# Altium PCB Radio_USB.pcbdoc
Units mm, origin at the board's own origin, x right, y up, seen from the top; angles counter-clockwise.
Board outline 52 x 67.1 mm, 2 copper layers (Top Layer, Bottom Layer); 75 components, 51 nets, 298 pads, 154 vias.
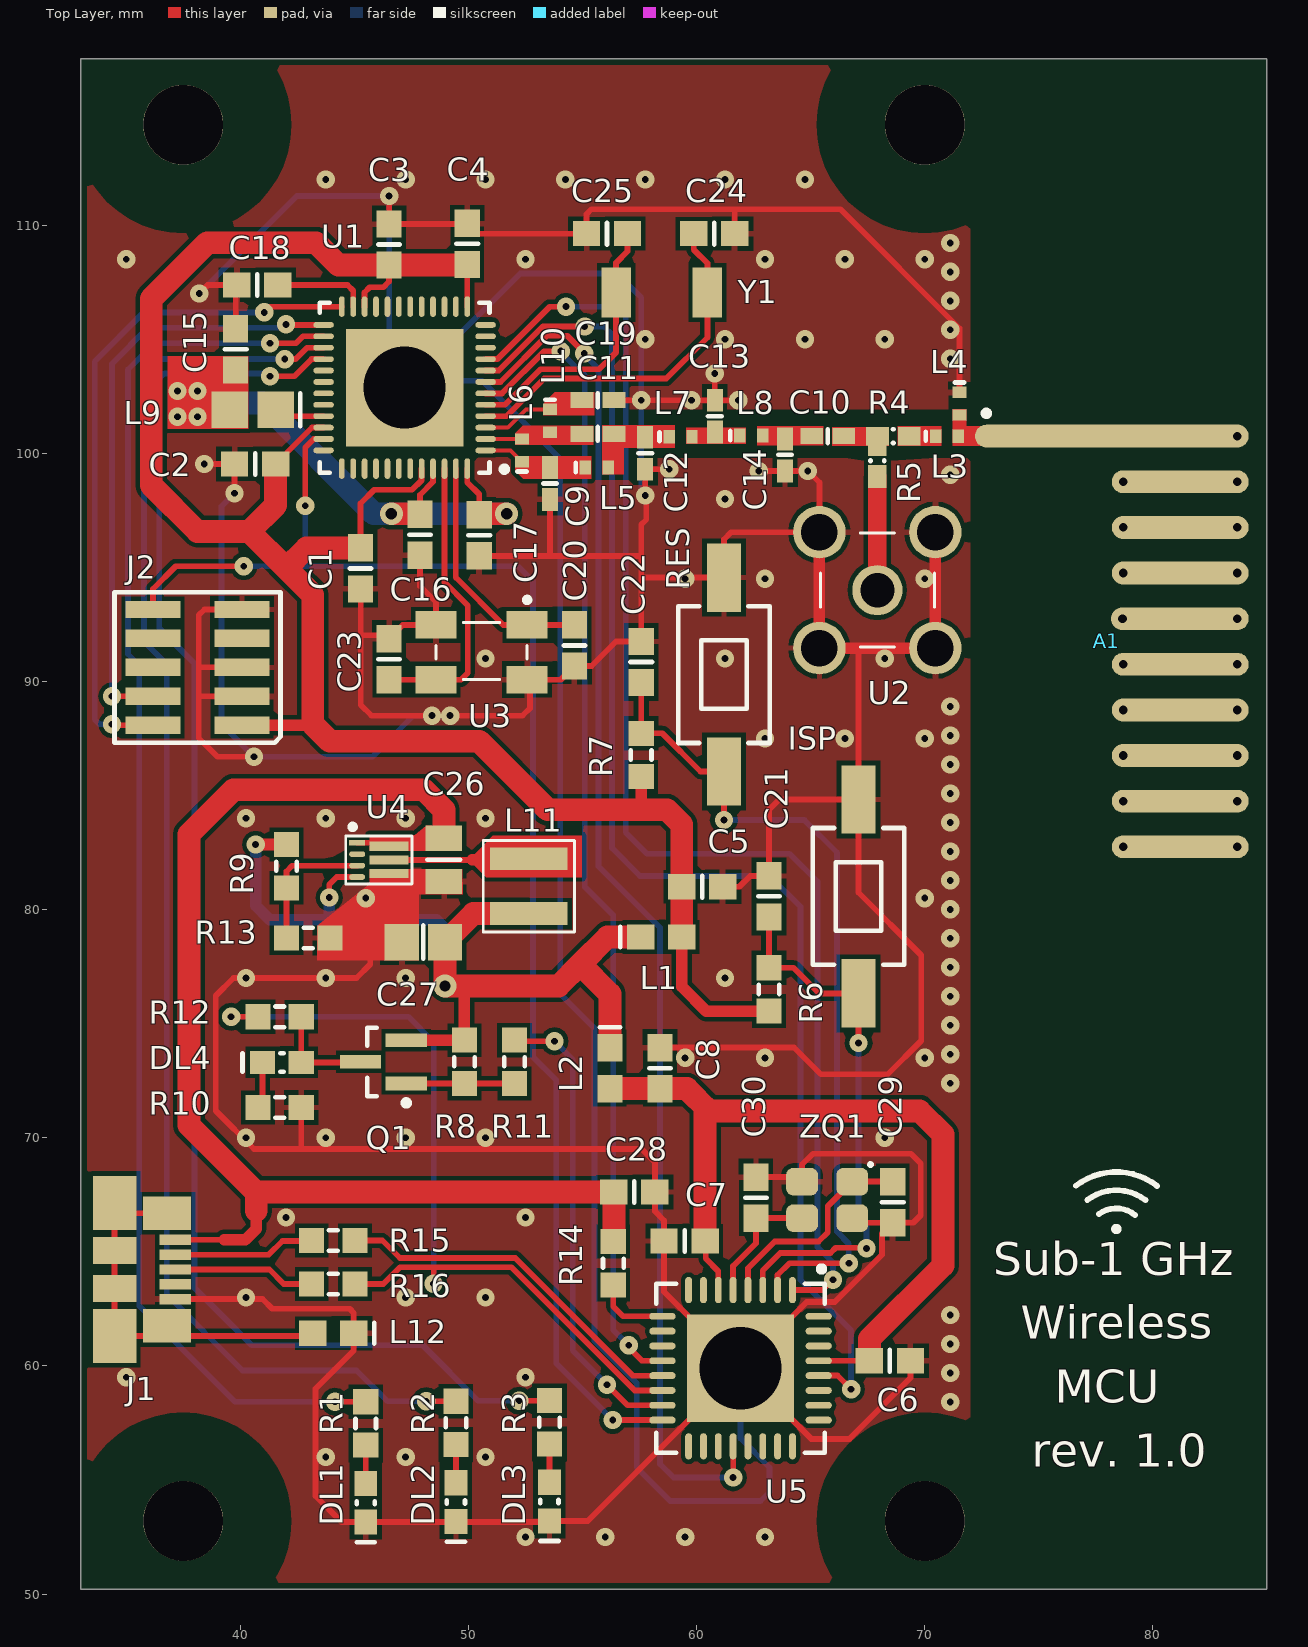
[diagram p0: Top Layer view]
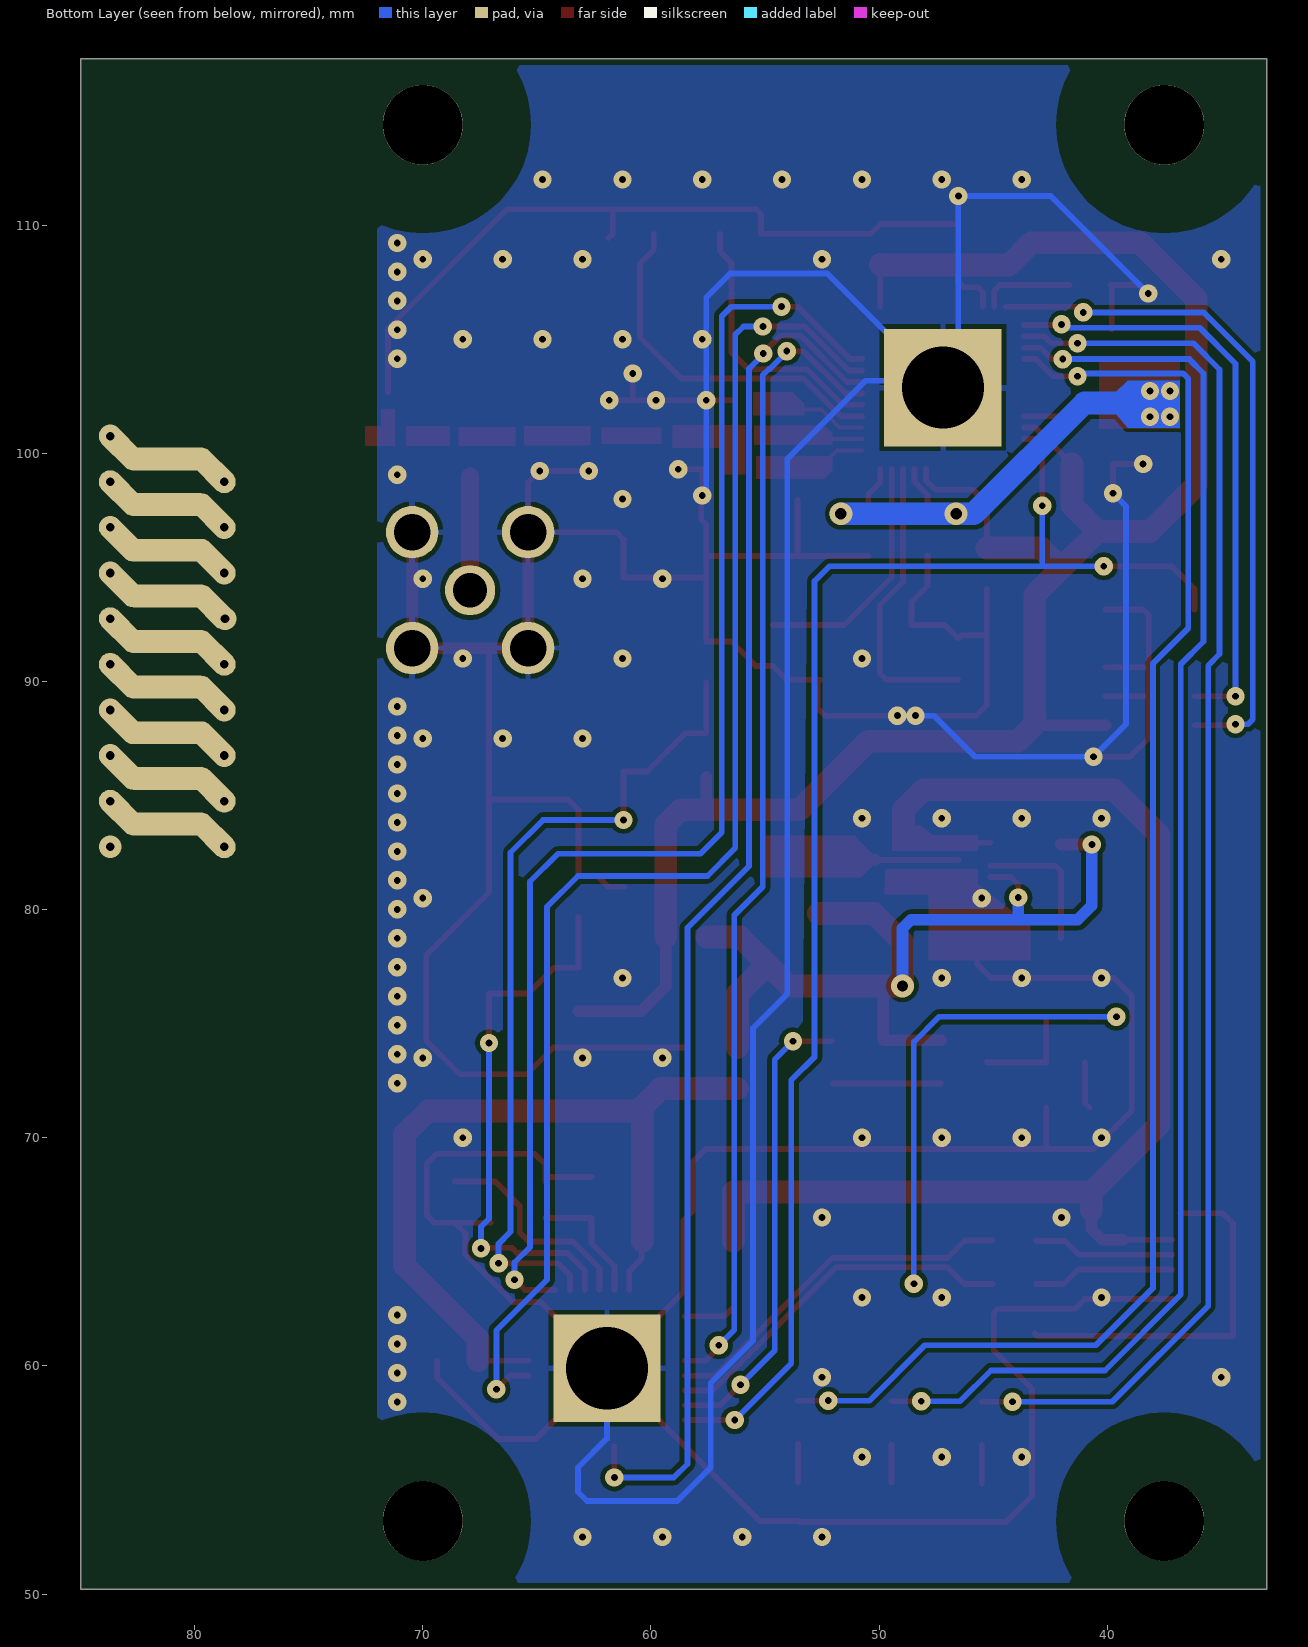
[diagram p1: Bottom Layer view, seen from below]
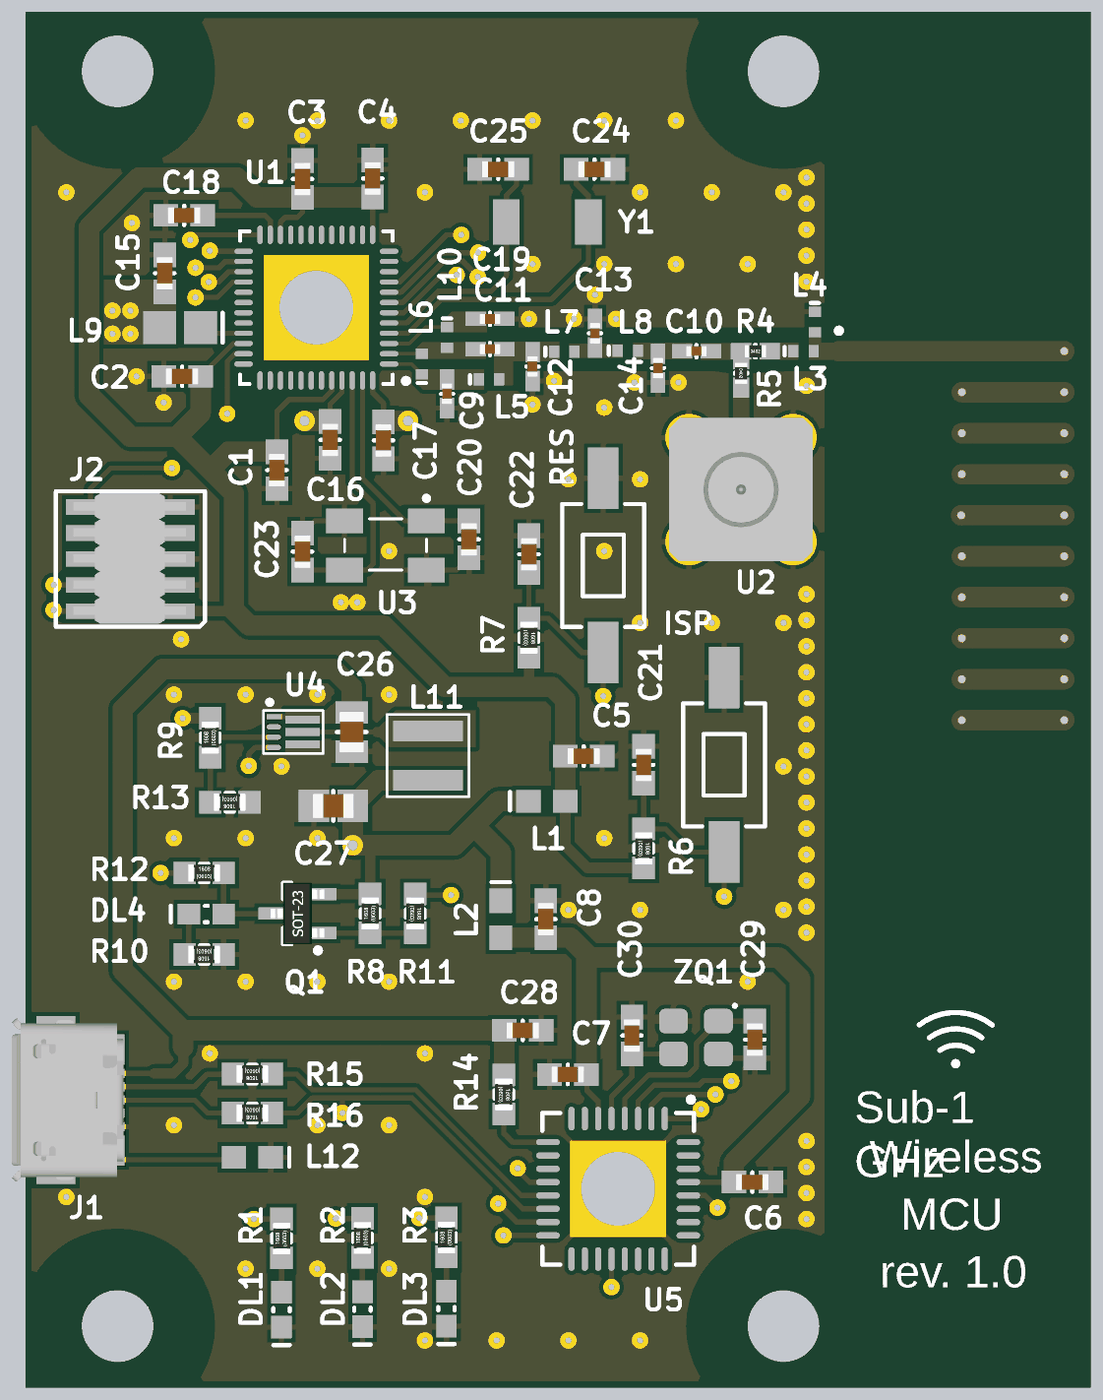
[diagram p2: 3D render of the assembled board from above, using the file's embedded part models]

## Layer stack, top to bottom
Top Solder: solder mask 0.0102, Solder Resist, Dk 3.5
Top Layer: signal copper 0.0356
Dielectric 1: dielectric 0.32, FR-4, Dk 4.8
Bottom Layer: signal copper 0.0356
Bottom Solder: solder mask 0.0102, Solder Resist, Dk 3.5

## Board outline
33,50.2 85,50.2 85,117.3 33,117.3

## Design rules (kind name [scope] priority, off if disabled: settings)
AssemblyTestPointUsage [All] p1 off:
AssemblyTestpoint [All] p1 off: testpointundercomponent=TRUE minsize=1.016 maxsize=2.54 preferedsize=1.524 minholesize=0 maxholesize=1.016 preferedholesize=0.813 testpointgrid=0.025 usegrid=TRUE gridtolerance=0 allowsidetop=TRUE allowsidebottom=TRUE
Clearance UnplatedPads_Clearance [IsPad and OnLayer('Multi-Layer') and not PadIsPlated] p1: gap=3
Clearance Poly_Clearance [InPolygon] p2: gap=0.2
Clearance Class4_ExtLayers_Clearance [All] p3: gap=0.15
Clearance Class4_IntLayers_Clearance [OnCopper and not (OnLayer('Top Layer') or OnLayer('Bottom Layer'))] p4: gap=0.15
DiffPairsRouting [All] p1: maxlimit=0.15 minlimit=0.15 mostfreqgap=0.15 toplayer_minwidth=0.25 toplayer_maxwidth=0.25 toplayer_prefwidth=0.25 bottomlayer_minwidth=0.25 bottomlayer_maxwidth=0.25 bottomlayer_prefwidth=0.25 maxuncoupledlength=10
FabricationTestPointUsage [All] p1 off: valid=0 allowmultiple=FALSE
FabricationTestpoint [All] p1 off: side=3 testpointundercomponent=TRUE minsize=1.016 maxsize=2.54 preferedsize=1.524 minholesize=0 maxholesize=1.016 preferedholesize=0.813 testpointgrid=0.025 allowsidetop=TRUE allowsidebottom=TRUE usegrid=TRUE gridtolerance=0
HoleSize HoleSize_UnplatedPads [IsPad and not PadIsPlated] p1: absolutevalues=TRUE maxlimit=999 minlimit=0.5 maxpercent=80.000 minpercent=20.000
HoleSize HoleSize_PlatedPads [IsPad and PadIsPlated] p2: absolutevalues=TRUE maxlimit=999 minlimit=0.3 maxpercent=80.000 minpercent=20.000
MinimumAnnularRing MinimumAnnularRing_Pad [IsPad and PadIsPlated] p1: minimumring=0.25
MinimumAnnularRing MinimumAnnularRing_Via [IsVia] p2: minimumring=0.15
MinimumSolderMaskSliver [All] p1: minsoldermaskwidth=0.15
NetAntennae [All] p1 off: netantennaetolerance=0
PlaneClearance [All] p1: clearance=0.3
PlaneConnect [All] p1: planeconnectstyle=Relief reliefexpansion=0.5 reliefentries=4 reliefconductorwidth=0.25 reliefairgap=0.2
PlaneConnect PlaneConnect_Via_Thermal [IsVia or InPadClass('ThermalPads')] p2: planeconnectstyle=Direct reliefexpansion=0.508 reliefentries=4 reliefconductorwidth=0.254 reliefairgap=0.254
PolygonConnect PolygonConnect_Via [IsVia] p1: connectstyle=Direct reliefconductorwidth=0.254 reliefentries=4 polygonreliefangle="90 Angle" airgapwidth=0.254
PolygonConnect [All] p2: connectstyle=Relief reliefconductorwidth=0.25 reliefentries=4 polygonreliefangle="90 Angle" airgapwidth=0.2
RoutingVias RADIO_RoutingVias [HasFootprint('ANTENNA')] p1: holewidth=0.2 width=1.2 viastyle="Through Hole" minholewidth=0 minwidth=0.5 maxholewidth=1 maxwidth=2
RoutingVias Thermal_RoutingVias [IsVia and InAnyComponent] p2: holewidth=0.2 width=0.5 viastyle="Through Hole" minholewidth=0.2 minwidth=0.5 maxholewidth=0.2 maxwidth=0.5
RoutingVias PWR_RoutingVias [InNetClass('PWR')] p3: holewidth=0.5 width=1 viastyle="Through Hole" minholewidth=0.3 minwidth=0.8 maxholewidth=0.5 maxwidth=1
RoutingVias [All] p4: holewidth=0.3 width=0.8 viastyle="Through Hole" minholewidth=0.3 minwidth=0.8 maxholewidth=0.3 maxwidth=0.8
ShortCircuit ShortCircuit_RADIO [HasFootprint('ANTENNA')] p1: allowed=TRUE
ShortCircuit [All] p2: allowed=FALSE
SilkToBoardRegionClearance [All] p1 off:
SilkToSilkClearance [All] p1: silktosilkclearance=0.15
SilkToSolderMaskClearance [IsPad vs IsText] p1: minsilkscreentomaskgap=0.05 clearancetoexposedcopper=TRUE
SolderMaskExpansion SolderMaskExpansion_Vias [IsVia] p1: expansion=-10
SolderMaskExpansion SolderMaskExpansion_Pads [IsPad] p2: expansion=0.05
Width PWR_Width [InNetClass('PWR')] p1: maxlimit=10 minlimit=0.25 preferedwidth=0.508
Width Class4_Width_ExtLayers [OnTopLayer or onBottomlayer] p2: maxlimit=10 minlimit=0.15 preferedwidth=0.15
Width Class4_Width_IntLayers [OnCopper and not (OnTopLayer or onBottomLayer)] p3: maxlimit=10 minlimit=0.15 preferedwidth=0.15
15 further rules are at their usual default settings.

## Classes and differential pairs
net class PWR: 3V3 NetL11_1 VBUS VDDR
differential pair USB: +USB_P -USB_N

## Components (designator, comment, footprint, x,y, rotation, side; value= is the part's Value field where it differs from the comment)
A1 "ANTENNA_HELICAL" ANTENNA 72.7,100.75 r0 top
C1 "CAPC_0603" CAPC1608-0603M 45.275,94.95 r90 top
C2 "CAPC_0603" CAPC1608-0603M 40.65,99.525 r0 top
C3 "CAPC_0603" CAPC1608-0603M 46.525,109.15 r270 top
C4 "CAPC_0603" CAPC1608-0603M 49.95,109.175 r270 top
C5 "CAPC_0603" CAPC1608-0603M 60.25,81 r180 top
C6 "CAPC_0603" CAPC1608-0603M 68.475,60.225 r180 top
C7 "CAPC_0603" CAPC1608-0603M 59.475,65.475 r0 top
C8 "CAPC_0603" CAPC1608-0603M 58.4,73.05 r270 top
C9 "CAPC_0402" CAPC1005-0402M 53.575,98.675 r270 top
C10 "CAPC_0402" CAPC1005-0402M 65.75,100.75 r0 top
C11 "CAPC_0402" CAPC1005-0402M 55.675,100.85 r0 top
C12 "CAPC_0402" CAPC1005-0402M 57.75,100 r90 top
C13 "CAPC_0402" CAPC1005-0402M 60.8,101.625 r270 top
C14 "CAPC_0402" CAPC1005-0402M 63.875,99.925 r90 top
C15 "CAPC_0603" CAPC1608-0603M 39.8,104.55 r270 top
C16 "CAPC_0603" CAPC1608-0603M 47.875,96.425 r90 top
C17 "CAPC_0603" CAPC1608-0603M 50.475,96.4 r90 top
C18 "CAPC_0603" CAPC1608-0603M 40.75,107.375 r0 top
C19 "CAPC_0402" CAPC1005-0402M 55.675,102.325 r180 top
C20 "CAPC_0603" CAPC1608-0603M 54.65,91.575 r90 top
C21 "CAPC_0603" CAPC1608-0603M 63.175,80.575 r270 top
C22 "CAPC_0603" CAPC1608-0603M 57.575,90.85 r270 top
C23 "CAPC_0603" CAPC1608-0603M 46.525,90.975 r270 top
C24 "CAPC_0603" CAPC1608-0603M 60.775,109.625 r180 top
C25 "CAPC_0603" CAPC1608-0603M 56.075,109.625 r0 top
C26 "CAPC_0805" CAPC2012-0805M#1 48.925,82.175 r90 top
C27 "CAPC_0805" CAPC2012-0805M#2 48.025,78.575 r0 top
C28 "CAPC_0603" CAPC1608-0603M 57.275,67.625 r180 top
C29 "CAPC_0603" CAPC1608-0603M 68.6,67.175 r90 top
C30 "CAPC_0603" CAPC1608-0603M 62.6,67.375 r270 top
DL1 "LED_0603" DIODEC1608-0603 45.5,54 r270 top
DL2 "LED_0603" DIODEC1608-0603 49.45,54.025 r270 top
DL3 "LED_0603" DIODEC1608-0603 53.55,54.05 r270 top
DL4 "LED_0603" DIODEC1608-0603 41.825,73.3 r180 top
ISP "SMD_SW" SMD_SW_1 67.1,80.575 r270 top (schematic designator S1)
J1 "USB-Micro-47346" USB_micro_B 37.152,64.225 r0 top
J2 "PLD-10-1.27-SMT" PLD-10-1.27-SMT 40.075,88.075 r180 top
L1 "INDC-0603" INDC1608M 58.45,78.8 r0 top
L2 "INDC-0603" INDC1608M 56.2,73.05 r270 top
L3 "INDC-0402" INDC1005-0402-RF2.4GHz 70.975,100.75 r0 top
L4 "INDC-0402" INDC1005-0402-RF2.4GHz 71.525,102.175 r270 top
L5 "INDC-0402" INDC1005-0402-RF2.4GHz 55.625,99.375 r0 top
L6 "INDC-0402" INDC1005-0402-RF2.4GHz 52.35,100.125 r90 top
L7 "INDC-0402" INDC1005-0402-RF2.4GHz 59.3,100.725 r0 top
L8 "INDC-0402" INDC1005-0402-RF2.4GHz 62.4,100.775 r0 top
L9 "INDC-0805" INDC2012M 40.55,101.9 r180 top
L10 "INDC-0402" INDC1005-0402-RF2.4GHz 53.575,101.425 r270 top
L11 "XFL4015" XFL4015 52.65,82.225 r270 top
L12 "INDC-0603" INDC1608M 44.078,61.431 r180 top
Q1 "BC857" SOT23-3M 46.275,73.325 r180 top
R1 "RESC_0603" RESC1608-0603M 45.5,57.475 r90 top
R2 "RESC_0603" RESC1608-0603M 49.45,57.5 r90 top
R3 "RESC_0603" RESC1608-0603M 53.55,57.525 r90 top
R4 "RESC_0402" RESC1005-0402M 68.625,100.75 r0 top
R5 "RESC_0402" RESC1005-0402M 67.925,99.675 r270 top
R6 "RESC_0603" RESC1608-0603M 63.175,76.5 r270 top
R7 "RESC_0603" RESC1608-0603M 57.575,86.775 r270 top
R8 "RESC_0603" RESC1608-0603M 49.825,73.325 r90 top
R9 "RESC_0603" RESC1608-0603M 42.025,81.9 r90 top
R10 "RESC_0603" RESC1608-0603M 41.725,71.325 r180 top
R11 "RESC_0603" RESC1608-0603M 52.025,73.325 r270 top
R12 "RESC_0603" RESC1608-0603M 41.725,75.3 r0 top
R13 "RESC_0603" RESC1608-0603M 42.975,78.75 r180 top
R14 "RESC_0603" RESC1608-0603M 56.35,64.5 r270 top
R15 "RESC_0603" RESC1608-0603M 44.078,65.495 r180 top
R16 "RESC_0603" RESC1608-0603M 44.078,63.59 r180 top
RES "SMD_SW" SMD_SW_1 61.2,90.3 r270 top (schematic designator S2)
U1 "CC1310F128RGZR" QFN-48M 47.2,102.875 r180 top
U2 "SMA_CONN" SMA_CONN 67.925,94 r0 top
U3 "ABM3B-24MHz" ABM3B-24MHz 52.575,90.075 r180 top
U4 "TPS62085RLT" RLT7-0506 45.125,82.925 r0 top
U5 "LPC1347FHN33" HVQFN33_L 61.928,59.897 r270 top
Y1 "KX-327XS" KX-327xs 60.475,107.05 r180 top
ZQ1 "QRZ3.2x2.5" QRZ3.2x2.5 66.825,68.075 r270 top

## Footprints (in the part's own frame and the unit in brackets; to place one, negate y for a bottom-side part, rotate by r counter-clockwise, add the part's x,y. Pads: shape width x height; smd on the part's side, far side on the other; paste and mask are expansions set on the pad)
ABM3B-24MHz [mm] "SMD Crystal, 24MHz"
  rect 1.8x1.2 smd: 1(0,-2.4) 2(4,-2.4) 3(4,0) 4(0,0)
  silkscreen extent -0.1,-3.6 4,0, body extent -0.5,-2.95 4.5,0.55, height 0.7
ANTENNA [mm] "ANTENNA_HELICAL"
  round 1 smd paste-1 mask-1: 1(0,0)
  oval 12x1 smd paste-12 mask-12: ""(5.5,0)
  oval 1x2.414 smd far side rot 135 paste-1.5 mask-1.5: ""(6.5,-17.5) ""(6.5,-15.5) ""(6.5,-13.5) ""(6.5,-11.5) ""(6.5,-9.5) ""(6.5,-7.5) ""(6.5,-5.5) ""(6.5,-3.5) ""(6.5,-1.5) ""(10.5,-16.5) ""(10.5,-14.5) ""(10.5,-12.5) ""(10.5,-10.5) ""(10.5,-8.5) ""(10.5,-6.5) ""(10.5,-4.5) ""(10.5,-2.5) ""(10.5,-0.5)
  oval 6x1 smd paste-6 mask-6: ""(8.5,-18) ""(8.5,-16) ""(8.5,-14) ""(8.5,-12) ""(8.5,-10) ""(8.5,-8) ""(8.5,-6) ""(8.5,-4) ""(8.5,-2)
  oval 4x1 smd far side paste-4 mask-4: ""(8.5,-17) ""(8.5,-15) ""(8.5,-13) ""(8.5,-11) ""(8.5,-9) ""(8.5,-7) ""(8.5,-5) ""(8.5,-3) ""(8.5,-1)
  silkscreen extent -0.12,0.88 0.13,1.12
CAPC1005-0402M [mm] "Chip Capacitor, Body 1.0x0.5mm, IPC Low Density"
  rect 1x0.7 smd: 1(-0.7,0) 2(0.7,0)
  silkscreen extent 0,-0.3 0,0.3, body extent -0.5,-0.25 0.5,0.25, height 0.5
CAPC1608-0603M [mm] "Chip Capacitor, Body 1.6x0.8mm, IPC Low Density"
  rect 1.2x1.1 smd: 1(-0.9,0) 2(0.9,0)
  silkscreen extent 0,-0.48 0,0.48, body extent -0.8,-0.4 0.8,0.4, height 0.6
CAPC2012-0805M#1 [mm] "Chip Capacitor, Body 2.0x1.3mm, IPC Low Density"
  rect 1.1x1.6 smd: 1(-0.95,0) 2(0.95,0)
  silkscreen extent 0,-0.72 0,0.72, body extent -1,-0.6 1,0.6, height 0.95
CAPC2012-0805M#2 [mm] "Chip Capacitor, Body 2.0x1.3mm, IPC Low Density"
  rect 1.5x1.6 smd: 1(-0.95,0) 2(0.95,0)
  silkscreen extent 0,-0.72 0,0.72, body extent -1,-0.6 1,0.6, height 0.95
DIODEC1608-0603 [mm] "Chip Diode; Body 1.6 x 0.8 mm (LxW typ)"
  rect 1.1x1 smd: 1(-0.85,0) 2(0.85,0)
  silkscreen extent -0.08,-0.4 1.73,0.4
HVQFN33_L [mm] "QFN, 32-Leads, Body 7.00x7.00mm, Pitch 0.65mm, Thermal Pad 4.70x4.70mm, IPC Low Density"
  oval 1.15x0.3 smd: 1(-3.425,2.275) 2(-3.425,1.625) 3(-3.425,0.975) 4(-3.425,0.325) 5(-3.425,-0.325) 6(-3.425,-0.975) 7(-3.425,-1.625) 8(-3.425,-2.275) 17(3.425,-2.275) 18(3.425,-1.625) 19(3.425,-0.975) 20(3.425,-0.325) 21(3.425,0.325) 22(3.425,0.975) 23(3.425,1.625) 24(3.425,2.275)
  oval 0.3x1.15 smd: 9(-2.275,-3.425) 10(-1.625,-3.425) 11(-0.975,-3.425) 12(-0.325,-3.425) 13(0.325,-3.425) 14(0.975,-3.425) 15(1.625,-3.425) 16(2.275,-3.425) 25(2.275,3.425) 26(1.625,3.425) 27(0.975,3.425) 28(0.325,3.425) 29(-0.325,3.425) 30(-0.975,3.425) 31(-1.625,3.425) 32(-2.275,3.425)
  rect 4.7x4.7 hole 3.6: 33(0,0)
  silkscreen extent -4.47,-3.7 3.7,3.7, body extent -3.55,-3.55 3.55,3.55, height 1
INDC1005-0402-RF2.4GHz [mm] "Chip Inductor, Body 1.0x0.5mm, RF 2.4GHz recommended design"
  rect 0.5x0.6 smd: 1(-0.5,0) 2(0.5,0)
  silkscreen extent -0.92,-0.2 -0.92,0.2, body extent -0.5,-0.25 0.5,0.25, height 0.55
INDC1608M [mm] "Chip Inductor, Body 1.6x0.8mm, IPC Low Density"
  rect 1.2x1.1 smd: 1(-0.9,0) 2(0.9,0)
  silkscreen extent -1.8,-0.45 -1.8,0.45, body extent -0.87,-0.48 0.87,0.48, height 0.71
INDC2012M [mm] "Chip Inductor, Body 2.0x1.2mm, IPC Low Density"
  rect 1.6x1.6 smd: 1(-1,0) 2(1,0)
  silkscreen extent -2.08,-0.72 -2.08,0.72, body extent -1.1,-0.7 1.1,0.7, height 1.1
KX-327xs [mm] "KX-327XS quartz rezonator"
  rect 1.3x2.2 smd: 1(0,0) 2(4,0)
  body extent -0.47,-0.91 4.48,0.91, height 0.96
PLD-10-1.27-SMT [mm] "PLD-10-1.27-SMT header"
  rect 2.4x0.76 smd: 1(0,0) 2(3.9,0) 3(0,-1.27) 4(3.9,-1.27) 5(0,-2.54) 6(3.9,-2.54) 7(0,-3.81) 8(3.9,-3.81) 9(0,-5.08) 10(3.9,-5.08)
  silkscreen extent -1.69,-5.84 5.59,0.76, body extent -0.77,-5.74 4.73,0.61, height 4.5
QFN-48M [mm] "QFN, 48-Leads, Body 7.00x7.00mm, Pitch 0.50mm, Thermal Pad 5.15x5.15mm, IPC Low Density"
  oval 0.9x0.25 smd: 1(-3.55,2.75) 2(-3.55,2.25) 3(-3.55,1.75) 4(-3.55,1.25) 5(-3.55,0.75) 6(-3.55,0.25) 7(-3.55,-0.25) 8(-3.55,-0.75) 9(-3.55,-1.25) 10(-3.55,-1.75) 11(-3.55,-2.25) 12(-3.55,-2.75) 25(3.55,-2.75) 26(3.55,-2.25) 27(3.55,-1.75) 28(3.55,-1.25) 29(3.55,-0.75) 30(3.55,-0.25) 31(3.55,0.25) 32(3.55,0.75) 33(3.55,1.25) 34(3.55,1.75) 35(3.55,2.25) 36(3.55,2.75)
  oval 0.25x0.9 smd: 13(-2.75,-3.55) 14(-2.25,-3.55) 15(-1.75,-3.55) 16(-1.25,-3.55) 17(-0.75,-3.55) 18(-0.25,-3.55) 19(0.25,-3.55) 20(0.75,-3.55) 21(1.25,-3.55) 22(1.75,-3.55) 23(2.25,-3.55) 24(2.75,-3.55) 37(2.75,3.55) 38(2.25,3.55) 39(1.75,3.55) 40(1.25,3.55) 41(0.75,3.55) 42(0.25,3.55) 43(-0.25,3.55) 44(-0.75,3.55) 45(-1.25,3.55) 46(-1.75,3.55) 47(-2.25,3.55) 48(-2.75,3.55)
  rect 5.15x5.15 hole 3.6: 49(0,0)
  silkscreen extent -4.5,-3.72 3.72,3.73, body extent -3.58,-3.57 3.57,3.58, height 1
QRZ3.2x2.5 [mm] "SMD quartz oscillator 3.2x2.5mm body 4 pads"
  rrect50% 1.2x1.4 smd: 1(0,0) 2(0,-2.2) 3(1.6,-2.2) 4(1.6,0)
  silkscreen extent -0.8,0.75 -0.7,0.85, body extent -0.45,-2.7 2.05,0.5, height 0.95
RESC1005-0402M [mm] "Chip Resistor, Body 1.1x0.5mm, IPC Low Density"
  rect 1x0.8 smd: 1(-0.7,0) 2(0.7,0)
  silkscreen extent -0.03,-0.3 0.03,0.3, body extent -0.52,-0.3 0.52,0.3, height 0.34
RESC1608-0603M [mm] "Chip Resistor, Body 1.6x0.8mm, IPC Low Density"
  rect 1.1x1.1 smd: 1(-0.95,0) 2(0.95,0)
  silkscreen extent -0.2,-0.45 0.2,0.45, body extent -0.77,-0.42 0.78,0.43, height 0.45
RLT7-0506 [mm] "DC-DC, step-down"
  rect 0.7x0.25 smd mask+0.05: 1(0,0)
  oval 0.7x0.25 smd mask+0.05: 2(0,-0.5) 3(0,-1) 4(0,-1.5)
  rect 1.7x0.4 smd mask-0.05: 5(1.4,-1.35) 6(1.4,-0.75) 7(1.4,-0.15)
  silkscreen extent -0.5,-1.8 2.4,0.8, body extent -0.2,-1.7 2.1,0.2, height 0.7
SMA_CONN [mm] "SMA PCB Connector"
  round 2.2 hole 1.5: 1(0,0)
  round 2.3 hole 1.6: 2(2.54,-2.54) 3(2.54,2.54) 4(-2.54,2.54) 5(-2.54,-2.54)
  silkscreen extent -2.5,-2.5 2.5,2.5, body extent -3.5,-3.5 3.5,3.5, height 10
SMD_SW_1 [mm]
  rect 3x1.5 smd: 1(-4.25,0) 2(4.25,0)
  silkscreen extent -3,-2 3,2, body extent -3,-2 3,2, height 4.1
SOT23-3M [mm] "SOT23, 3-Leads, Body 2.9x1.3mm, Pitch 0.95mm, Lead Span 2.5mm, IPC Low Density"
  rect 1.8x0.6 smd: 1(-1,0.95) 2(-1,-0.95) 3(1,0)
  silkscreen extent -1.13,-1.5 0.7,1.92, body extent -1.32,-1.5 1.32,1.5, height 1.08
USB_micro_B [mm] "Micro-USB OTG B type Molex 47346"
  rect 1.38x0.45 smd: 1(0,1.3) 2(0,0.65) 3(0,0) 4(0,-0.65)
  rect 1.38x0.45 smd mask+0.05: 5(0,-1.3)
  rect 1.9x2.375 smd: SHIELD(-2.66,-2.912) SHIELD(-2.66,2.912)
  rect 1.9x1.175 smd: SHIELD(-2.66,-0.837) SHIELD(-2.66,0.838)
  rect 2.1x1.475 smd: SHIELD(-0.36,-2.462) SHIELD(-0.36,2.462)
  body extent -4.8,-3.99 0.62,3.99, height 2.71
XFL4015 [mm] "XFL4015 Series Power Inductors"
  rect 1x3.4 smd: 1(0,0) 2(2.4,0)
  silkscreen extent -0.8,-2 3.2,2, body extent -0.8,-2 3.2,2, height 0.7

## Part data
A1: "PCB helical antenna"
C1 C2 C3 C4 C5 C6 C7 C8 C15 C16 C17 C18 C20 C21 C22 C23 C24 C25 C28 C29 C30: "Capacitor 0603"
C9 C10 C11 C12 C13 C14 C19: "Capacitor 0402"
C26 C27: "Capacitor 0805"
DL1 DL2 DL3 DL4: "LED 0603"
ISP RES: "Switch"
J1: "Micro USB B Molex 47346"
L1 L2 L12: "Chip Inductor, Body Body 1.6x0.8mm"
L3 L4 L5 L6 L7 L8 L10: "Chip Inductor, Body 1.0x0.5mm"
L9: "Chip Inductor, Body Body 2.0x1.2mm"
L11: "Power Inductors"
Q1: "BC857 PNP Transistor"
R1 R2 R3 R6 R7 R8 R9 R10 R11 R12 R13 R14 R15 R16: "Resistor 0603"
R4 R5: "Resistor 0402"
U1: "Ultralow Power Sub-1-GHz Wireless MCU"
U2: "SMA Straight PCB Socket"
U3: "Crystal Oscillator, 24 MHz, SMD, 5mm x 3.2mm"
U4: "Step-Down Converter With Hiccup Short-Circuit Protection, 2.5-V to 6.0-V input Voltage Range"
U5: "NXP 32-bit ARM Cortex-M3"
Y1: "Surface Mount Quartz Crystal"
ZQ1: "Quartz SMD 3.2*2.5 mm body 4 pads"

## Free pads (board coordinates)
  round 3.5 hole 3.5 unplated: 0(37.5,53.2) 0(37.5,114.4) 0(70,53.2) 0(70,114.4)

## Via types
v1: diameter 0.8, hole 0.3, Top Layer to Bottom Layer, 132 vias
v2: diameter 1, hole 0.38, Top Layer to Bottom Layer, 19 vias
v3: diameter 1, hole 0.5, Top Layer to Bottom Layer, 3 vias

## Nets (pads, with @x,y where several pads share a name; then routed paths per layer and width w, separated by ;. In a path a pad name is that pad's centre, name@x,y a point inside that pad or via, vN(x,y) a via of type N, cw(c..) or ccw(c..) an arc to the next point about the centre after c; other vN are vias at no path point)
3V3: C27.2 L1.1 L2.1 L11.2 Q1.2 R8.2 R9.2 U4.4 | length 42.9
  Top Layer w0.254: v1(43.9,80.525) 43.9,81.1 44.225,81.425 U4.4
  Top Layer w0.508: v1(40.675,82.85) R9.2 ; Q1.2 R8.2 49.825,76.475 50,76.65
  Top Layer w1: L11.2 50.225,79.825 C27.2 v3(48.975,76.65) 50,76.65 53.95,76.65 54.9,77.6 ; L2.1 56.2,76.3 54.9,77.6 ; L1.1 56.1,78.8 54.9,77.6
  Bottom Layer w0.508: v1(40.675,82.85) 40.675,80.175 41.3,79.55 48.6,79.55 48.975,79.175 v3(48.975,76.65) ; 43.9,79.6 v1(43.9,80.525)
CPU_RESET: C22.2 R7.1 RES.2 U5.2 | length 36.4
  Top Layer w0.254: C22.2 R7.1 58.5,87.725 60.175,86.05 RES.2 v1(61.2,83.925) ; U5.2 63.553,63.978 64.075,64.5 v1(66.675,64.5)
  Bottom Layer w0.254: v1(61.2,83.925) 64.725,83.925 66.15,82.5 66.15,65.875 66.675,65.35 v1(66.675,64.5)
DCDC_SW: L9.1 U1.33 | length 2.1
  Top Layer w0.254: L9.1@41.55,101.625 U1.33
GND: C1.1 C2.1 C3.1 C4.1 C5.1 C6.1 C7.1 C8.1 C9.2 C12.1 C13.1 C14.1 C15.1 C16.1 C17.1 C18.1 C19.1 C20.1 C21.1 C22.1 C23.1 C24.1 C25.1 C26.1 C27.1 C28.1 C29.1 C30.1 DL1.2 DL2.2 DL3.2 ISP.1 J1.5 J2.3 J2.5 J2.9 L4.1 L12.1 R10.1 R13.1 RES.1 U1.49 U2.2 U2.3 U2.4 U2.5 U3.2 U3.4 U4.5 U5.33 ZQ1.2 ZQ1.4 | length 421.5
  Top Layer w0.25: v1(38.2,107) 38.575,107.375 C18.1 39.8,107.325 C15.1 ; 38.23,89.345 J2.3 ; 38.26,90.615 J2.5 ; v1(38.425,99.525) C2.1 v1(39.75,98.25) ; J2.9 38.43,93.155 38.175,92.9 38.175,87.525 39,86.7 v1(40.6,86.7) ; 45.275,92.1 45.35,92.025 46.375,92.025 C23.1 47.125,92.475 U3.2 48.575,93.475 47.875,94.175 C16.1 ; C1.1 45.275,88.975 45.75,88.5 v1(48.4,88.5) ; v1(46.525,111.275) C3.1 49.925,110.05 50.35,109.625 C25.1 55.175,110.475 55.4,110.7 61.7,110.7 ; v1(49.2,88.5) 52.375,88.5 52.7,88.825 52.7,89.95 U3.4 54.05,90.075 C20.1 55.4,90.675 56.475,91.75 C22.1 57.575,94.6 ; C17.1 53.6,95.5 ; C9.2 53.575,95.525 53.6,95.5 ; 57.575,95.5 53.6,95.5 ; C8.1 64.275,73.95 65.45,72.775 68.375,72.775 69.85,74.25 69.85,78 67.1,80.75 ISP.1 ; v1(58.8,99.3) C12.1 v1(57.75,98.15) 57.8,98.1 57.8,97.1 57.575,96.875 57.575,94.6 ; C5.1 61.875,81 62.35,81.475 C21.1 ; C24.1 61.675,110.675 61.7,110.7 ; U2.4 61.515,96.54 61.2,96.225 RES.1 57.625,94.55 57.575,94.6 ; L4.1 71.525,105.475 66.3,110.7 61.7,110.7
  Top Layer w0.254: J1.5 40.975,62.925 41.4,62.5 44.8,62.5 44.978,62.322 L12.1 44.978,60.678 43.3,59 43.3,54.3 44.45,53.15 DL1.2 DL3.2@53.5,53.15 ; R10.1 42.675,69.525 42.7,69.5 ; 45.7,78.7 45.7,77.6 45.1,77 39.7,77 38.923,76.223 38.923,71.177 40.6,69.5 42.7,69.5 ; DL3.2 55.231,53.2 U5.33 ; C19.1 v1(57.575,102.325) v1(59.775,102.325) C13.1 ; v1(60.8,103.5) C13.1 ; C24.1 C24.1@61.875,109.425 ; v1(61.825,102.325) C13.1 ; C30.1 ZQ1.2@64.425,68.275 ; v1(62.725,99.225) C14.1 v1(64.875,99.225) 65.385,98.715 U2.4 ; C21.1 63.175,84.375 63.625,84.825 ISP.1 67.1,91.41 67.05,91.46 ; ZQ1.2 64.625,68.825 65.1,69.3 69.4,69.3 69.825,68.875 69.825,66.6 69.5,66.275 C29.1 ; ZQ1.4@67.025,66.275 C29.1 ; C6.1 69.375,59.475 66.7,56.8 65.025,56.8 U5.33 ; 42.7,69.5 57.6,69.5 58.175,68.925 C28.1 58.175,66.775 58.575,66.375 C7.1 58.575,63.25 U5.33 ; U5.33 64.831,62.8 66.057,62.8 68.127,64.87 68.127,65.802 C29.1
  Top Layer w0.5: U2.4 U2.5 67.05,91.46 U2.2 U2.3
  Bottom Layer w0.25: v1(38.2,107) 42.475,111.275 v1(46.525,111.275) 46.525,103.55 U1.49 ; v1(39.75,98.25) 39.175,97.675 39.175,88.125 v1(40.6,86.7) 45.8,86.7 47.6,88.5 v1(48.4,88.5) v1(49.2,88.5)
  Bottom Layer w0.254: U1.49 U1.49@47.2,103.025 ; U1.49@47.2,103.175 U1.49@47.575,103.175 ; v1(57.75,98.15) 57.575,98.325 v1(57.575,102.325) 57.575,106.825 56.525,107.875 52.275,107.875 U1.49@47.575,103.175 ; U5.33 61.928,56.822 63.2,55.55 63.2,54.475 62.8,54.075 58.85,54.075 57.375,55.55 57.375,59.25 55.525,61.1 55.525,74.8 54.025,76.3 54.025,99.75 50.6,103.175 U1.49@47.575,103.175
  other v1: 52.5,52.5 56,52.5 59.5,52.5 63,52.5 43.75,56 47.25,56 50.75,56 71.12,58.42 35,59.5 52.5,59.5 71.12,59.69 71.12,60.96 71.12,62.23 40.25,63 47.25,63 50.75,63 42,66.5 52.5,66.5 40.25,70 43.75,70 47.25,70 50.75,70 68.25,70 71.12,72.39 59.5,73.5 63,73.5 70,73.5 71.12,73.66 71.12,74.93 71.12,76.2 40.25,77 43.75,77 47.25,77 61.25,77 71.12,77.47 71.12,78.74 71.12,80.01 45.5,80.5 70,80.5 71.12,81.28 71.12,82.55 71.12,83.82 40.25,84 43.75,84 47.25,84 50.75,84 71.12,85.09 71.12,86.36 63,87.5 66.5,87.5 70,87.5 71.12,87.63 71.12,88.9 50.75,91 61.25,91 68.25,91 59.5,94.5 63,94.5 70,94.5 61.25,98 71.12,99.06 71.12,104.14 57.75,105 61.25,105 64.75,105 68.25,105 71.12,105.41 71.12,106.68 71.12,107.95 35,108.5 52.5,108.5 63,108.5 66.5,108.5 70,108.5 71.12,109.22 43.75,112 47.25,112 50.75,112 54.25,112 57.75,112 61.25,112 64.75,112
ISP: C21.2 ISP.2 R6.1 U5.3 | length 23.8
  Top Layer w0.25: C21.2 R6.1 64.25,77.45 65.375,76.325 ISP.2 v1(67.1,74.15)
  Top Layer w0.254: U5.3 62.903,64.178 63.671,64.946 65.871,64.946 66.102,65.177 66.955,65.177 66.957,65.175 67.45,65.175 v1(67.45,65.15)
  Bottom Layer w0.25: v1(67.1,74.15) 67.1,66.45 67.45,66.1 v1(67.45,65.15)
JTAG_TCK: J2.4 U1.25 | length 26.4
  Top Layer w0.254: v1(34.375,89.35) 34.38,89.345 J2.4 ; v1(42,105.65) 42.025,105.625 U1.25
  Bottom Layer w0.254: v1(34.375,89.35) 34.375,103.925 35.948,105.498 41.848,105.498 v1(42,105.65)
JTAG_TMS: J2.2 U1.24 | length 30.2
  Top Layer w0.254: v1(34.375,88.125) 34.375,88.075 J2.2 ; v1(41.05,106.175) 41.3,106.425 U1.24
  Bottom Layer w0.254: v1(34.375,88.125) 33.825,88.125 33.625,88.325 33.625,104.025 35.775,106.175 v1(41.05,106.175)
MISO: U1.7 U5.20 | length 60.4
  Top Layer w0.25: v1(61.603,55.103) U5.20
  Top Layer w0.254: U1.7 51.404,103.125 53.431,105.152 54.33,105.152 55.075,104.407 v1(55.075,104.375)
  Bottom Layer w0.254: v1(55.075,104.375) 55.075,104.325 55.7,103.7 55.7,81.9 58.4,79.2 58.4,55.7 58.997,55.103 v1(61.603,55.103)
MOSI: U1.6 U5.12 | length 50.9
  Top Layer w0.25: v1(57.025,60.9) 56.925,60.9 57.603,60.222 U5.12
  Top Layer w0.254: U1.6 51.475,102.625 53.325,104.475 v1(54.05,104.475)
  Bottom Layer w0.254: v1(54.05,104.475) 54.05,104.443 54.795,103.698 54.827,103.698 55.1,103.425 55.1,81 56.35,79.75 56.35,61.575 v1(57.025,60.9)
NetA1_1: A1.1 L3.2 L4.2
NetC9_1: C9.1 L5.1 L6.1 U1.1 | length 1.8
  Top Layer w0.178: U1.1 51.85,100.125 L6.1
NetC10_1: C10.1 C14.2 L8.2
NetC10_2: C10.2 R4.1 R5.1
NetC11_1: C11.1 L6.2 L10.2 U1.2 | length 1.6
  Top Layer w0.178: U1.2 L6.2
NetC11_2: C11.2 C12.2 L5.2 L7.1
NetC13_2: C13.2 L7.2 L8.1
NetC18_2: C18.2 U1.23 | length 4.1
  Top Layer w0.254: C18.2 44.7,107.375 44.95,107.125 U1.23
NetC19_2: C19.2 L10.1 U1.3 | length 3.2
  Top Layer w0.178: U1.3 51.725,101.125 52.525,101.925 L10.1
NetC20_2: C20.2 U1.47 U3.1 | length 10.8
  Top Layer w0.25: U1.47 49.45,94.55 51.525,92.475 U3.1 C20.2
NetC23_2: C23.2 U1.46 U3.3 | length 12.9
  Top Layer w0.25: C23.2 U3.3 49.675,90.075 49.975,90.375 49.975,93.325 48.95,94.35 U1.46
NetC24_2: C24.2 U1.4 Y1.1 | length 16
  Top Layer w0.254: U1.4 51.675,101.625 53.325,103.275 58.675,103.275 60.475,105.075 Y1.1 60.475,108.325 59.875,108.925 C24.2
NetC25_2: C25.2 U1.5 Y1.2 | length 11.9
  Top Layer w0.254: U1.5 51.604,102.125 53.158,103.679 55.729,103.679 56.475,104.425 Y1.2 ; Y1.2@56.475,107.25 56.475,108.35 56.975,108.85 C25.2
NetC29_2: C29.2 U5.4 ZQ1.1 | length 9.5
  Top Layer w0.254: U5.4 62.253,64.278 63.425,65.45 65.35,65.45 65.75,65.85 65.75,67 ZQ1.1 C29.2
NetC30_2: C30.2 U5.5 ZQ1.3 | length 5.6
  Top Layer w0.254: U5.5 61.603,64.374 62.6,65.371 C30.2 ZQ1.3
NetDL1_1: DL1.1 R1.1 | length 1.7
  Top Layer w0.254: DL1.1 R1.1
NetDL2_1: DL2.1 R2.1 | length 1.7
  Top Layer w0.254: DL2.1 R2.1
NetDL3_1: DL3.1 R3.1 | length 1.7
  Top Layer w0.254: DL3.1 R3.1
NetDL4_1: DL4.1 Q1.3 R12.2 | length 4.6
  Top Layer w0.254: R12.2 DL4.1 45.25,73.3 Q1.3
NetDL4_2: DL4.2 R10.2 | length 2.1
  Top Layer w0.254: R10.2 40.975,71.525 DL4.2
NetJ1_2: J1.2 R15.2 | length 6.2
  Top Layer w0.25: J1.2 41.25,64.875 41.85,65.475 R15.2@43.108,65.475
  Top Layer w0.254: R15.2@43.108,65.475 R15.2
NetJ1_3: J1.3 R16.2 | length 6.2
  Top Layer w0.25: J1.3 41.275,64.225 41.91,63.59 R16.2
NetJ1_SHIELD: J1.SHIELD L12.2 | length 16.1
  Top Layer w0.254: J1.SHIELD@36.792,66.688 34.942,66.688 34.492,66.238 34.492,65.063 34.492,63.388 34.492,61.313 43.06,61.313 L12.2
NetL3_1: L3.1 R4.2
NetL11_1: L11.1 U4.6 | length 6.1
  Top Layer w0.254: U4.6 50.175,82.175
  Top Layer w0.508: 50.175,82.175 L11.1@52.6,82.175
NetQ1_1: Q1.1 R8.1 R11.2 | length 4.8
  Top Layer w0.254: Q1.1 R11.2
NetR1_2: R1.2 U1.26 | length 62.1
  Top Layer w0.254: v1@41.303,104.823 v1(41.303,104.821) 42.446,104.821 42.75,105.125 U1.26 ; v1(44.15,58.425) R1.2
  Bottom Layer w0.254: v1(41.303,104.821) 36.221,104.821 35.075,103.675 35.075,91.2 35.575,90.7 35.575,62.625 39.775,58.425 v1(44.15,58.425)
NetR2_2: R2.2 U1.27 | length 63.7
  Top Layer w0.254: v1(41.95,104.125) 42.425,104.125 42.925,104.625 U1.27 ; v1(48.15,58.45) R2.2
  Bottom Layer w0.254: v1(41.95,104.125) 36.4,104.125 35.775,103.5 35.775,91.75 36.775,90.75 36.775,63.125 40.1,59.8 45.1,59.8 46.45,58.45 v1(48.15,58.45)
NetR3_2: R3.2 U1.28 | length 65.8
  Top Layer w0.254: v1(41.3,103.375) 42.375,103.375 43.125,104.125 U1.28 ; v1(52.225,58.475) R3.2
  Bottom Layer w0.254: v1(41.3,103.375) 41.173,103.502 36.677,103.502 36.45,103.275 36.45,92.325 38,90.775 38,63.4 40.5,60.9 48,60.9 50.425,58.475 v1(52.225,58.475)
NetR5_2: R5.2 U2.1 | length 5
  Top Layer w0.8: U2.1 R5.2
NetR9_1: R9.1 R13.2 U4.3 | length 6.1
  Top Layer w0.25: R13.2 R9.1 42.025,81.675 42.275,81.925 U4.3
NetR14_2: R14.2 U5.9 | length 3.3
  Top Layer w0.254: R14.2 56.35,62.6 56.778,62.172 U5.9
RF_RESET: J2.10 U1.35 U5.16 | length 64.8
  Top Layer w0.25: v1(42.85,97.7) 42.85,100.256 43.219,100.625 U1.35
  Top Layer w0.254: J2.10 36.175,94.05 37.175,95.05 v1(40.15,95.05) ; v1(56.328,57.622) U5.16
  Bottom Layer w0.25: 42.85,95.05 v1(42.85,97.7)
  Bottom Layer w0.254: v1(40.15,95.05) 42.85,95.05 52.175,95.05 52.825,94.4 52.825,73.55 53.85,72.525 53.85,60.1 v1(56.328,57.622)
SCK: U1.8 U5.28 | length 62.1
  Top Layer w0.254: U1.8 51.332,103.625 53.263,105.556 v1(55.094,105.556) ; U5.28 66.178,59.572 v1(66.775,58.975)
  Bottom Layer w0.254: v1(55.094,105.556) 55.944,105.556 56.3,105.2 56.3,82.7 57.525,81.475 63.2,81.475 64.555,80.12 64.555,63.77 66.775,61.55 v1(66.775,58.975)
SSEL: U1.9 U5.1 | length 58.9
  Top Layer w0.254: U1.9 51.261,104.125 53.561,106.425 v1(54.275,106.425) ; U5.1 65.522,63.322 v1(65.975,63.775)
  Bottom Layer w0.254: v1(54.275,106.425) 56.475,106.425 56.898,106.002 56.898,102.043 56.9,102.041 56.9,83.375 57.825,82.45 64.075,82.45 65.3,81.225 65.3,65.2 65.975,64.525 v1(65.975,63.775)
USB_CONN: R11.1 U5.15 | length 20.5
  Top Layer w0.254: R11.1@52.075,74.225 v1(53.775,74.225) ; v1(56.075,59.175) 56.978,58.272 U5.15
  Bottom Layer w0.254: v1(53.775,74.225) 54.575,73.425 54.575,60.675 v1(56.075,59.175)
USB_N: R15.1 U5.13 | length 15.9
  Top Layer w0.25: R15.1 46.23,65.495 47,64.725 52.05,64.725 57.203,59.572 U5.13
USB_P: R12.1 R16.1 U5.14 | length 37.8
  Top Layer w0.25: v1(39.6,75.3) R12.1 ; R16.1 46.265,63.59 47,64.325 51.884,64.325 57.287,58.922 U5.14 ; v1(48.475,63.6) 48.475,64.3
  Bottom Layer w0.25: v1(39.6,75.3) 47.375,75.3 48.475,74.2 v1(48.475,63.6)
VBUS: C26.2 C28.2 J1.1 R14.1 U4.1 U4.7 | length 55.2
  Top Layer w0.25: J1.1 39.3,65.525 ; U4.1 46.375,82.925 U4.7
  Top Layer w0.5: 39.3,65.525 40.225,65.525 40.7,66 40.7,66.8
  Top Layer w1: 40.7,66.8 40.7,67.6 ; C26.2 48.925,84.375 48.05,85.25 39.7,85.25 37.75,83.3 37.75,70.55 40.7,67.6 ; R14.1@56.375,65.475 C28.2 40.725,67.625 40.7,67.6
VCPU: C6.2 C7.2 C8.2 L2.2 U5.6 U5.29 | length 37.2
  Top Layer w0.254: C7.2 60.4,65.45 60.4,64.7 60.953,64.147 U5.6 ; U5.29 65.356,60.225 C6.2
  Top Layer w1: L2.2 C8.2 59.575,72.15 60.55,71.175 69.775,71.175 70.8,70.15 70.8,64.4 67.575,61.175 C6.2 ; C7.2 60.375,71.35
VDDR: C15.2 C16.2 C17.2 L9.2 U1.45 U1.48 | length 22.2
  Top Layer w0.25: C16.2 47.875,98.175 48.45,98.75 U1.45 ; U1.48 49.95,98.725 50.475,98.2 C17.2
  Top Layer w1: v3(46.625,97.35) C16.2@47.85,97.35 ; C17.2@50.525,97.35 v3(51.675,97.35)
  Bottom Layer w1: 38.325,102.2 41,102.2 45.85,97.35 v3(46.625,97.35) v3(51.675,97.35)
  other v1: 37.25,101.6 38.125,101.6 37.25,102.725 38.125,102.725
VDDS: C1.2 C2.2 C3.2 C4.2 C5.2 J2.1 L1.2 R6.2 R7.2 U1.13 U1.22 U1.34 U1.44 | length 92
  Top Layer w0.254: C2.2 43.15,101.125 U1.34 ; C1.2 45.275,97.8 45.875,98.4 47.531,98.4 47.95,98.819 U1.44 ; U1.22 45.45,107.05 45.675,107.275 46.275,107.275 46.525,107.525 C3.2 ; U1.13 C4.2
  Top Layer w0.508: J2.1 43.225,88.075 ; 57.575,84.375 R7.2 ; L1.2 59.35,76.625 60.425,75.55 R6.2
  Top Layer w1: C2.2 41.55,97.725 40.4,96.575 ; C1.2 42.9,95.85 42.013,94.962 ; C4.2 49.925,108.25 C3.2 44.3,108.25 43.325,109.225 38.55,109.225 36.1,106.775 36.1,98.6 38.125,96.575 40.4,96.575 ; L1.2 59.35,83.725 58.7,84.375 57.575,84.375 53.475,84.375 50.475,87.375 43.925,87.375 43.175,88.125 43.175,93.8 42.013,94.962 ; 40.4,96.575 42.013,94.962
pads on no net: A1. J1.4 J2.6 J2.7 J2.8 U1.10 U1.11 U1.12 U1.14 U1.15 U1.16 U1.17 U1.18 U1.19 U1.20 U1.21 U1.29 U1.30 U1.31 U1.32 U1.36 U1.37 U1.38 U1.39 U1.40 U1.41 U1.42 U1.43 U4.2 U5.7 U5.8 U5.10 U5.11 U5.17 U5.18 U5.19 U5.21 U5.22 U5.23 U5.24 U5.25 U5.26 U5.27 U5.30 U5.31 U5.32
copper on no net:
  other v2: 78.7,82.75 83.7,82.75 78.7,84.75 83.7,84.75 78.7,86.75 83.7,86.75 78.7,88.75 83.7,88.75 78.7,90.75 83.7,90.75 78.669,92.749 83.7,92.75 78.7,94.75 83.7,94.75 78.7,96.75 83.7,96.75 78.7,98.75 83.7,98.75 83.7,100.75

## Polygon pours and split planes (outlines as drawn)
GND on Top Layer "Top Layer-No Net" (solid, remove dead copper, pour order 6): 33.3,50.5 33.3,117.3 33.3,117.001 85,117.001 85,50.5
GND on Bottom Layer "Top Layer-No Net" (solid, remove dead copper, pour order 8): 33.3,50.5 33.3,117 85,117 85,50.5

## Other copper
Top Layer:
  region net GND: 49.725,81.775 45.675,81.775 45.675,81.125 43.375,79.3 43.375,77.775 47.825,77.775 47.825,80.675 49.75,80.675
  region net VBUS: 45.675,82.575 45.675,83.275 47.65,83.25 48.15,83.675 49.425,83.675 49.425,82.575
  region net NetL11_1: 50.275,81.925 50.775,81.425 54.975,81.425 54.975,83.225 51.075,83.225 50.775,82.925 50.275,82.425
  region net NetA1_1: 71.225,101.925 71.225,100.325 72.525,100.325 72.525,101.175 71.825,101.175 71.825,101.925
  region net NetL3_1: 68.825,101.175 70.725,101.175 70.725,100.325 68.825,100.325
  region net NetC10_2: 65.95,100.325 65.95,101.15 68.425,101.15 68.425,100.325
  region net NetC10_1: 62.65,101.175 65.55,101.175 65.55,100.35 62.65,100.35
  region net NetC13_2: 59.55,100.425 62.15,100.425 62.15,101.125 59.55,101.125
  region net NetC11_2: 55.875,99.075 56.8,99.075 56.8,100.25 59.05,100.25 59.05,101.225 55.875,101.225
  region net NetC19_2: 53.275,101.675 53.275,102.175 53.775,102.675 55.525,102.675 55.525,101.675
  region net NetC11_1: 52.05,100.375 55.475,100.375 55.475,101.2 52.375,101.2 52.05,100.875
  region net NetC9_1: 52.05,99.875 52.05,99.225 52.4,98.875 55.375,98.875 55.375,99.875
  region net VDDR: 40.35,101.075 40.35,104.25 36.825,104.25 36.825,101.075
  pour cut-out: 53.625,98.825 56.975,98.825 56.975,99.775 71.875,99.775 71.875,101.925 53.625,101.925
  pour cut-out: 72,117 72,50.5 85,50.5 85,117
Bottom Layer:
  region net VDDR: 36.825,103.175 36.825,101.125 39.1,101.125 39.6,101.7 39.6,102.7 39.1,103.175
  pour cut-out: 72,50.5 72,117 85,117 85,50.5

## Silkscreen, mask and mechanical layers (free items; w line width, h text height)
Top Overlay:
  circle w0.254: c78.4,66 r0.1
  lines w0.254: 76.627,67.895 cw(c78.4,65.6) 80.187,67.884 ; 77.124,67.268 cw(c78.4,65.6) 79.676,67.268 ; 77.633,66.654 cw(c78.4,65.6) 79.215,66.618
  text "Sub-1 GHz" at 73,63.5 h2.5
  text "Wireless" at 74.2,60.7 h2.5
  text "MCU" at 75.7,57.9 h2.5
  text "rev. 1.0" at 74.7,55.1 h2.5
Top Solder:
  region: 36.4,60.975 36.4,67.475 37.9,67.475 37.9,60.975
Mechanical 4:
  lines w0.127: 33,50.2 33,117.3 85,117.3 85,116.7 85,50.2 33,50.2

## Dimensions
33,50.2 to 85,50.2 on Mechanical 1
33,117.3 to 33,50.2 on Mechanical 1

## Text inside footprints (layer, text, board x,y; h text height)
J1: Mechanical 1 "PCB edge" at 32.927,63.575 h1 r90; Mechanical 1 "Front face" at 32.177,63.55 h1 r90